# EAGLE board batman6 (EAGLE 7.5.0)
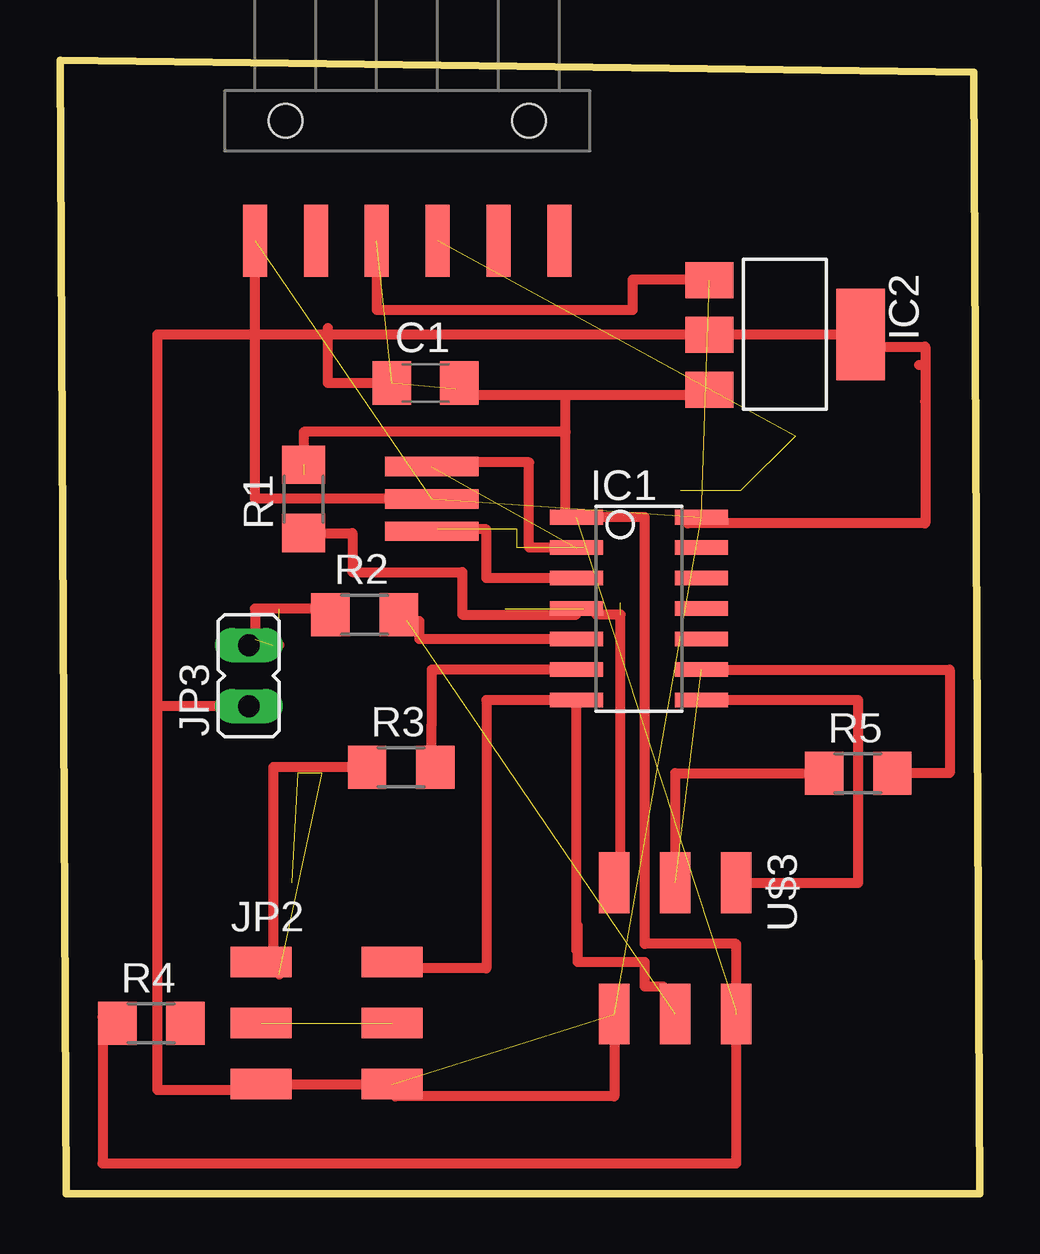
[diagram p0: board, top side]

Size 38.35 x 47.24 mm. Coordinates in mm from the lower left corner, seen from the top.
Outline: 0.25,2.54 0.25,0
Outline: 0.25,0 0,47.24 38.1,46.74 38.35,0 0.25,0
Copper layers (1*16): Top 0.035mm / dielectric 1.5mm / Bottom 0.035mm
Design rules "default": minimum track width 10mil, minimum drill 24mil, track to track 8mil, track to pad 8mil, pad to pad 8mil, via to via 8mil, smd to smd 8mil, copper to edge 40mil, drill to drill 8mil, minimum pad ring 10mil, minimum via ring 8mil, stop-mask expansion 4mil, vias tented up to drill 0mil, thermal gap 10mil

## Footprints (pad centres in the part's own frame; a part is rotated, then mirrored left to right if it is on the bottom)
C1206 = smd 1.6 x 1.8: 1 -1.4,0; 2 1.4,0
SOIC14 = smd 0.61 x 2.21: 1 -3.81,-2.603; 2 -2.54,-2.603; 3 -1.27,-2.603; 4 0,-2.603; 5 1.27,-2.603; 6 2.54,-2.603; 7 3.81,-2.603; 8 3.81,2.603; 9 2.54,2.603; 10 1.27,2.603; 11 0,2.603; 12 -1.27,2.603; 13 -2.54,2.603; 14 -3.81,2.603
SOT223 = smd 1.499 x 2.007: 1 -2.261,-3.15; 2 0.025,-3.15; 3 2.311,-3.15 | smd 3.81 x 2.007: 4 0,3.15
1X06-SMD = smd 1 x 3: 1 -6.35,5; 2 -3.81,5; 3 -1.27,5; 4 1.27,5; 5 3.81,5; 6 6.35,5 | hole 1.4: -5.08,0; 5.08,0
2X03SMD = smd 2.54 x 1.27: 1 -2.54,2.54; 2 2.92,2.54; 3 -2.54,0; 4 2.92,0; 5 -2.54,-2.54; 6 2.92,-2.54
JP1 = drill 0.914 long: 1 0,-1.27; 2 0,1.27
R1206 = smd 1.6 x 1.803: 1 -1.422,0; 2 1.422,0
EFOBM = smd 0.8 x 3.9: 1 -1.35,0; 2 0,0; 3 1.35,0

## Placement (x,y rotation side)
C1  22 uF  [C1206]  15.24,33.78 0 top
IC1  ATTINY44-SSU  [SOIC14]  24.13,24.38 270 top
IC2  REG1117  [SOT223]  30.23,35.81 270 top
JP1  [1X06-SMD]  14.48,44.7 180 top
JP2  [2X03SMD]  10.92,7.11 0 top
JP3  [JP1]  7.87,21.59 0 top
R1  10K  [R1206]  10.16,28.96 90 top
R2  499  [R1206]  12.7,24.13 0 top
R3  0K  [R1206]  14.22,17.78 0 top
R4  0K  [R1206]  3.81,7.11 0 top
R5  0K  [R1206]  33.27,17.53 0 top
U$1  RESONATOR  [EFOBM]  15.49,28.96 270 top
U$3  AVRISPSMD  [2X03SMD]  25.65,10.41 270 top

## Library data of the parts
C1 IC1 JP2 R1-R5 U$1 U$3 = fab
IC2 = burr-brown; MPN: REG1117; OC_FARNELL: 1097566; OC_NEWARK: 14P6981
JP1 = SparkFun
JP3 = jumper

## Nets
CTS: JP1.5
GND: IC1.14 IC2.1 JP1.6 JP2.5 JP2.6 U$1.2 U$3.6
JP2: IC1.4 R1.1
MISO: IC1.8 U$3.1
MOSI: U$3.4
N$3: IC1.2 U$1.1
N$4: IC1.3 U$1.3
N$5: JP2.3 JP2.4
N$30: C1.1 IC1.1 JP1.4 R1.2 U$3.2
RST: U$3.5
RTS: JP1.1
RX: JP1.2
SCK: IC1.9 U$3.3
SERVO1: IC1.6
SERVO2: IC1.7
TX: JP1.3

## Tracks (layer width: path | path; a pad name or v marks a point on that pad's centre or on a via)
GND  (5 unrouted)
  Top 0.406: JP2.5 JP2.6
JP2
  Top 0.406: R1.1 12.19,27.53 12.19,25.91 16.76,25.91 16.76,24.13 21.53,24.13 IC1.4
MISO
  Top 0.406: U$3.1 33.27,12.95 33.27,20.57 IC1.8
MOSI  (1 unrouted)
  Top 0.406: 14.48,24.38 14.48,23.88
N$1
  Top 0.406: 21.84,21.84 15.49,21.84 15.49,19.56 15.49,17.53
N$2  (3 unrouted)
  Top 0.406: 9.14,9.14 9.14,9.4 8.89,9.4 8.89,17.78 12.7,17.78
N$3  (1 unrouted)
N$4
  Top 0.406: IC1.3 17.78,25.65 17.78,27.69 15.49,27.69 U$1.3
N$5  (1 unrouted)
N$14  (2 unrouted)
  Top 0.406: 8.89,22.86 9.14,22.86 | 11.43,24.13 11.43,24.38 8.13,24.38 8.13,23.11
N$16  (1 unrouted)
N$17  (3 unrouted)
N$19
  Top 0.406: 13.21,39.37 13.21,36.83 23.88,36.83 23.88,38.1 26.67,38.1 26.67,37.85
N$21
  Top 0.406: 15.24,28.96 8.13,28.96 8.13,38.86
N$23
  Top 0.406: 21.84,26.92 19.56,26.92 19.56,30.48 16.26,30.48 16.26,30.23
N$25
  Top 0.406: 25.15,8.64 24.38,8.64 24.38,9.65 21.59,9.65 21.59,11.18
N$26
  Top 0.406: 21.84,23.11 14.99,23.11 14.99,23.88
N$28
  Top 0.406: 2.29,7.37 1.78,7.37 1.78,1.27 28.19,1.27 28.19,7.37
N$29  (1 unrouted)
  Top 0.406: 23.11,12.7 23.37,12.7 23.37,24.13 22.35,24.13 22.35,24.38
N$30  (5 unrouted)
  Top 0.406: 28.45,7.62 28.19,7.62 | IC1.1 21.08,28.19 21.08,31.75 | 21.08,31.75 10.16,31.75 10.16,29.97 | 26.92,33.27 21.08,33.27 | 21.08,33.27 16.51,33.27 16.51,33.53 | 21.08,31.75 21.08,33.27
N$31
  Top 0.406: 7.11,20.32 4.06,20.32
N$32
  Top 0.406: 23.11,6.86 23.11,4.06 13.97,4.06 13.97,4.83
N$33
  Top 0.406: 8.38,4.32 4.06,4.32 4.06,35.81 33.02,35.81 33.02,35.31 36.07,35.31 36.07,34.54 | 35.81,34.54 36.07,34.54 | 36.07,34.54 36.07,33.02 36.07,27.94 26.16,27.94 26.16,28.19
N$34
  Top 0.406: 13.97,33.78 11.18,33.78 11.18,36.07
N$35
  Top 0.406: 26.92,21.84 37.08,21.84 37.08,17.53 34.8,17.53
N$36
  Top 0.406: 28.19,7.87 28.19,10.41 24.38,10.41 24.38,28.19 22.1,28.19
SCK  (1 unrouted)
  Top 0.406: U$3.3 25.65,17.53 31.75,17.53
SERVO2
  Top 0.406: 21.53,10.16 IC1.7 17.78,20.57 17.78,9.4 13.97,9.4
TX  (3 unrouted)